# Altium PCB AT_START_F426 V1.0.pcbdoc (part 3 of 3)
Units mil, origin at the board's own origin, x right, y up, seen from the top; angles counter-clockwise.
Board outline 4602.43 x 3597.64 mil, 2 copper layers (Top Layer, Bottom Layer); 123 components, 105 nets, 472 pads, 880 vias.
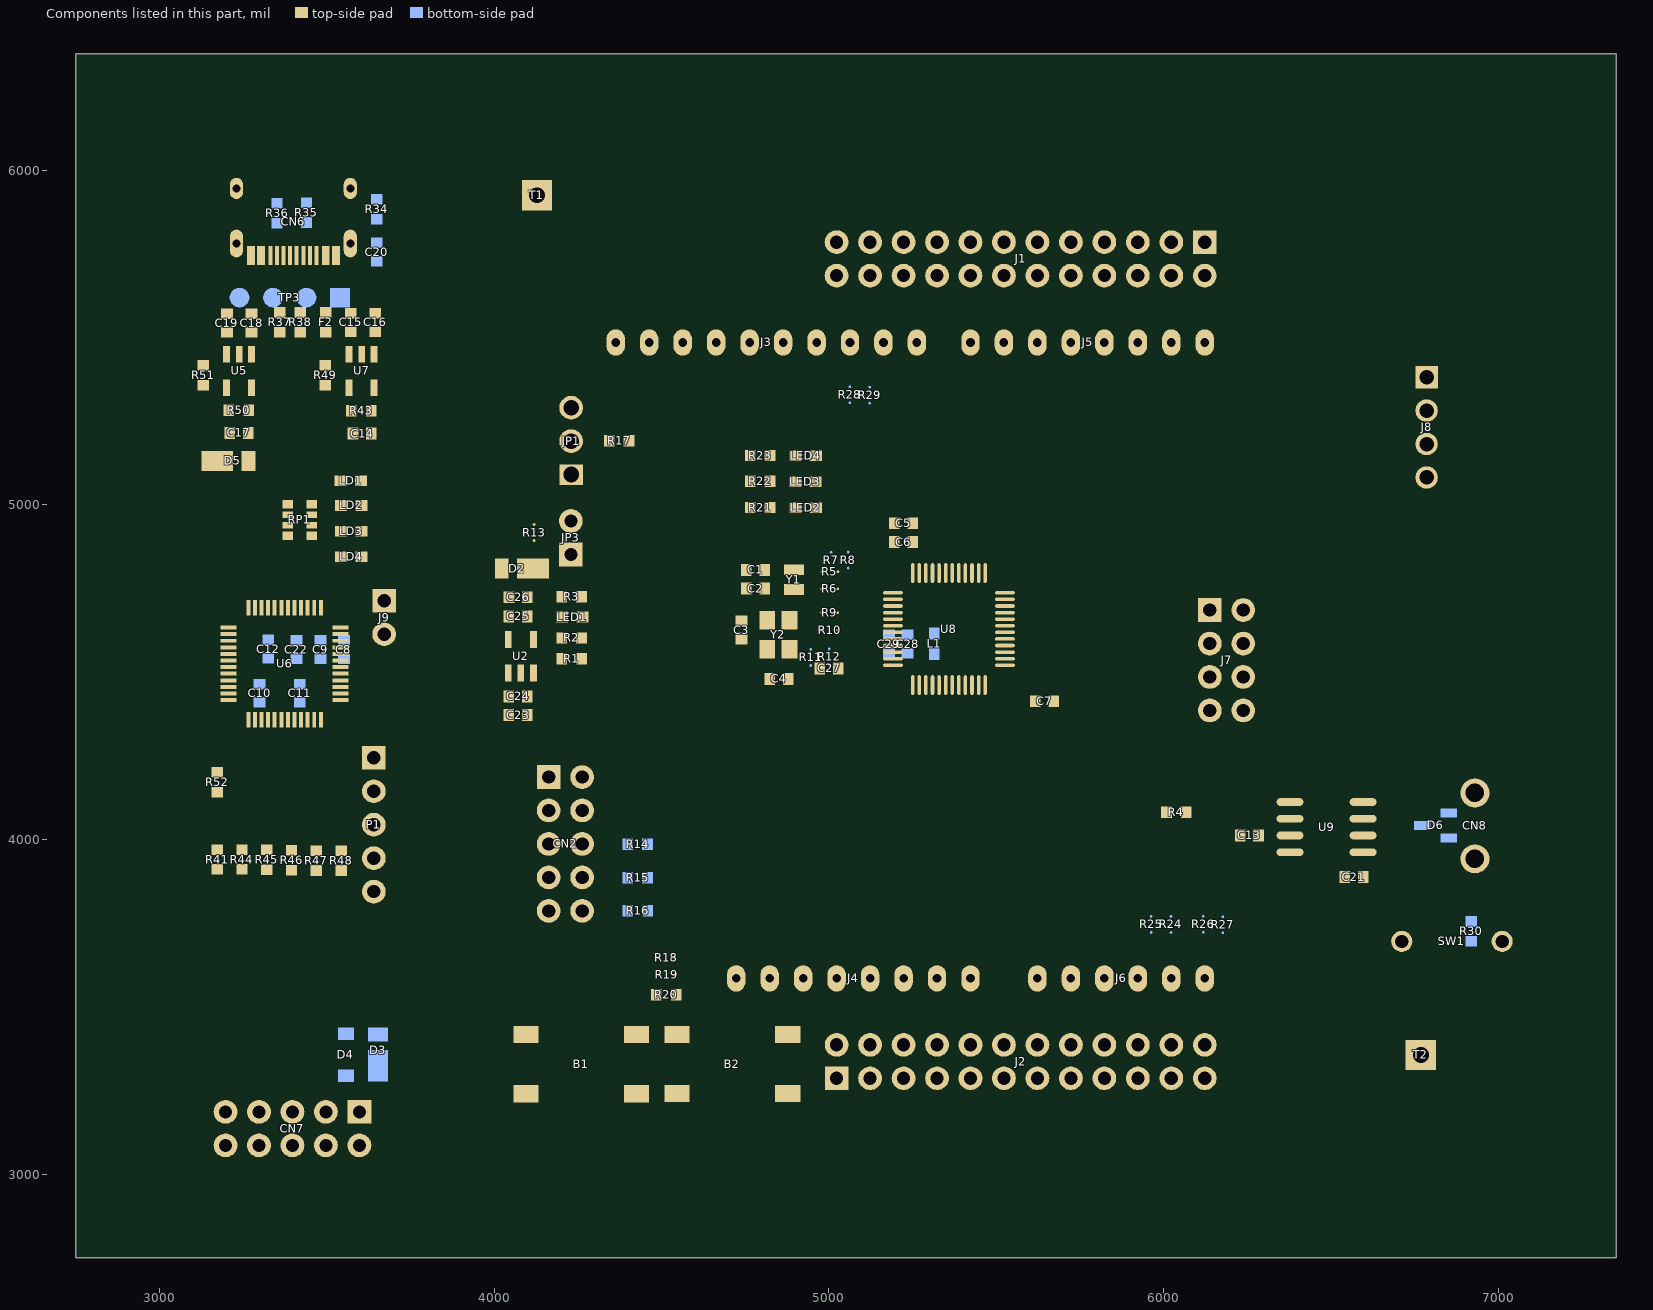
[diagram p3: the components of this part, seen from the top]

## Silkscreen, mask and mechanical layers (free items; w line width, h text height)
Top Silkscreen Layer:
  region: 6025.22,5363.76 6005.22,5343.76 6045.22,5343.76
  region: 6105.22,5363.76 6145.22,5363.76 6125.22,5343.76
  lines w6: 3247.17,3310.09 3247.17,3609.09 ; 3347.23,3310.38 3347.23,3609.09 ; 3447.23,3310.06 3447.23,3609.09 ; 3547.23,3310.06 3547.23,3609.09 ; 4092.37,4187.05 4058.2,4221.22 4058.2,4152.63 4092.5,4186.93 ; 4112.92,3938.94 4076.7,3938.94 4076.7,4033.54 4112.92,4033.54
  lines w8: 3348.17,3235.38 3348.17,3275 3449.17,3275 3449.17,3234.38 ; 3637.17,3303.09 3561.17,3303.09 3600.17,3264.09 3638.17,3302.09
  lines w10: 4735.22,5203.76 6165.22,5203.76 ; 5002.76,3878.27 5455.76,3878.27 ; 5594.19,3878.41 6154.19,3878.41 ; 6558.34,5128.71 6715.82,5128.71 ; 6558.34,5230.37 6715.82,5230.37 ; 6558.34,5328.52 6715.82,5328.52
  text "25" at 6089.12,5955.79 h55.07
  text "47" at 4985.28,5955.39 h55.47
  text "41" at 5295.68,5955.39 h55.47
  text "31" at 5791.84,5955.39 h55.47
  text "B8" at 5113.48,5837.96 h61.63 r45
  text "B7" at 5216,5837.96 h61.63 r45
  text "B5" at 5313.05,5837.96 h61.63 r45
  text "B3" at 5410.41,5837.96 h61.63 r45
  text "A14" at 5504.53,5837.96 h61.63 r45
  text "F6" at 5615.26,5837.96 h61.63 r45
  text "A12" at 5700.85,5837.96 h61.63 r45
  text "A10" at 5803.24,5837.96 h61.63 r45
  text "A8" at 5907.01,5837.96 h61.63 r45
  text "B14" at 6004.61,5837.96 h61.63 r45
  text "B12" at 6104.61,5837.96 h61.63 r45
  text "GND" at 5000.88,5831.81 h61.63 r45
  text "GND" at 4060.22,5753.76 h73.96
  text "BOOT0 /  /F11" at 5163.69,5540.01 h43
  text "B9" at 5122.31,5527.68 h61.63 r45
  text "B6" at 5328.88,5527.68 h61.63 r45
  text "B4" at 5430.31,5527.68 h61.63 r45
  text "A15" at 5521.44,5528.17 h58.55 r45
  text "F7" at 5631.4,5527.68 h61.63 r45
  text "A13" at 5722.77,5528.17 h58.55 r45
  text "A11" at 5826.16,5527.68 h61.63 r45
  text "A9" at 5930.55,5527.68 h61.63 r45
  text "B15" at 6025.8,5528.17 h58.55 r45
  text "B13" at 6123.65,5528.17 h58.55 r45
  text "VDD" at 5014.56,5518.7 h59 r45
  text "USART1" at 6656.32,5453.51 h72
  text "4" at 5764.6,5375.24 h73.42 r90
  text "8" at 5303.6,5374.24 h73.42 r90
  text "7" at 5467.6,5374.24 h73.42 r90
  text "2" at 5961.6,5374.24 h73.42 r90
  text "3V3" at 6571.48,5342.98 h72
  text "13" at 4801.89,5335.23 h73.96 r90
  text "12" at 4901.89,5335.23 h73.96 r90
  text "#6" at 5563.89,5329.23 h73.96 r90
  text "#5" at 5664.89,5329.23 h73.96 r90
  text "#9" at 5202.89,5328.23 h73.96 r90
  text "#3" at 5863.89,5328.23 h73.96 r90
  text "#11" at 5001.89,5290.34 h73.96 r90
  text "#10" at 5102.89,5290.34 h73.96 r90
  text "SCL" at 4401.89,5280.34 h73.96 r90
  text "SDA" at 4501.89,5280.34 h73.96 r90
  text "GND" at 4702.59,5280.34 h73.96 r90
  text "GND" at 3990.22,5253.76 h74
  text "TX" at 6596.28,5241.83 h72
  text "TX 1" at 6064.89,5237.45 h73.96 r90
  text "RX 0" at 6165.89,5237.45 h73.96 r90
  text "VDDA" at 4602.59,5235.45 h73.96 r90
  text "DIGITAL(#=PWM)" at 5162.76,5215.82 h73.96
  text "LD:" at 3666.18,5187.13 h55.47 r270
  text "BOOT0" at 3930.22,5148.76 h73.96
  text "RX" at 6596.28,5141.03 h72
  text "1" at 3668.58,5073.91 h55.07 r270
  text "AT-Link-EZ V1.4" at 3058.4,5051.56 h90 r270
  text "VDD" at 3990.22,5048.76 h74
  text "GND" at 6572.48,5040.92 h72
  text "2" at 3667.58,5006.91 h55.07 r270
  text "3" at 3666.58,4933.91 h55.07 r270
  text "IDD" at 4309.22,4869.76 h73.96
  text "4" at 3667.58,4858.91 h55.07 r270
  text "5V" at 6314.87,4646.94 h73.96
  text "MISO" at 5896.09,4643.76 h73.96
  text "MOSI" at 6319.63,4546.72 h73.96
  text "SCK" at 5898.54,4545.18 h73.96
  text "RESET" at 5847.39,4446.59 h73.96
  text "GND" at 6316.98,4446.51 h73.96
  text "NSS" at 5900.47,4348.01 h73.96
  text "PB11" at 6319.09,4346.84 h73.96
  text "CAN1" at 6839.26,4280.78 h73.96
  text "AT-Link" at 4090.22,4248.76 h74
  text "3V3" at 3890.11,4143.54 h72
  text "E5V" at 4334.11,4141.54 h72
  text "H" at 6758.98,4127.92 h73.96 r90
  text "BOOT0" at 4334.11,4047.54 h72
  text "SWDIO" at 3843.31,4043.54 h72
  text "AT-START-F426 V1.0" at 4676.05,3951.1 h110
  text "SWCLK" at 3820.51,3949.54 h72
  text "SWO" at 4334.11,3943.54 h72
  text "L" at 6758.98,3914.12 h73.96 r90
  text "NRST" at 3880.11,3849.54 h72
  text "USART1_RX" at 4334.11,3843.54 h72
  text "POWER" at 5234.35,3797.44 h73.96
  text "ANALOG IN" at 5758.94,3796.99 h73.96
  text "GND" at 3928.11,3745.54 h72
  text "USART1_TX" at 4334.11,3743.54 h72
  text "IOREF" at 4864.59,3668.41 h73.96 r90
  text "RESET" at 4964.59,3668.41 h73.96 r90
  text "3.3V" at 5062.59,3666.45 h73.96 r90
  text "VIN" at 5466.59,3664.19 h73.96 r90
  text "5V" at 5162.59,3662.23 h73.96 r90
  text "AN0" at 5659.59,3659.19 h73.96 r90
  text "AN1" at 5759.59,3659.19 h73.96 r90
  text "AN2" at 5860.59,3659.34 h73.96 r90
  text "AN3" at 5959.59,3659.19 h73.96 r90
  text "AN4" at 6059.59,3659.19 h73.96 r90
  text "AN5" at 6159.59,3659.19 h73.96 r90
  text "GND" at 5269.59,3657.19 h73.96 r90
  text "GND" at 5371.59,3657.19 h73.96 r90
  text "SWC" at 3357.12,3601.52 h64.72 r270
  text "GND" at 3165.81,3600.51 h64.72 r270
  text "SWD" at 3455.74,3600.37 h64.72 r270
  text "3V3" at 3562.37,3599.36 h64.72 r270
  text "NRST" at 3263.81,3595.66 h64.72 r270
  text "120Ω" at 6793.52,3527.9 h73.96
  text "BOOT0" at 3457.64,3439.04 h58 r270
  text "F1*" at 5210.88,3438.28 h54 r45
  text "NC" at 5325.22,3437.08 h61.63 r45
  text "A0" at 5414.64,3437.08 h61.63 r45
  text "A2" at 5508.14,3437.08 h61.63 r45
  text "A4" at 5607.77,3437.08 h61.63 r45
  text "A6" at 5708.37,3437.08 h61.63 r45
  text "B0" at 5816.32,3437.08 h61.63 r45
  text "B2" at 5913.36,3437.08 h61.63 r45
  text "B11" at 6009.05,3437.08 h61.63 r45
  text "C15*" at 5098.31,3432.97 h54 r45
  text "C13" at 5002.02,3431.77 h58.55 r45
  text "E5V" at 3560.31,3429.96 h64.72 r270
  text "SWO" at 3362.85,3426.08 h64.72 r270
  text "VDD" at 6100.9,3423.71 h61.63 r45
  text "RX" at 3164.92,3414.94 h64.72 r270
  text "TX" at 3263.81,3414.98 h64.72 r270
  text "GND" at 6856.58,3314.51 h73.96
  text "NC" at 5435.22,3133.76 h61.63 r45
  text "F0*" at 5206.69,3132.13 h54 r45
  text "B10" at 6027.02,3131.92 h55.47 r45
  text "F8" at 5031.78,3130.93 h61.63 r45
  text "A1" at 5527.91,3130.93 h61.63 r45
  text "A3" at 5628.09,3130.93 h61.63 r45
  text "A5" at 5732.65,3130.93 h61.63 r45
  text "A7" at 5831.27,3130.93 h61.63 r45
  text "B1" at 5931.33,3130.93 h61.63 r45
  text "C14*" at 5112.78,3126.83 h54 r45
  text "GND" at 6114.58,3125.56 h59 r45
  text "NRST /  /F2" at 5270.76,3117.01 h50
  text "RESET" at 4149.79,3101.72 h73.96
  text "USER" at 4621.95,3102.45 h73.96
  text "7" at 5299.89,3050.58 h55.47
  text "1" at 5017.62,3049.93 h55.47
  text "17" at 5799.09,3049.57 h55.47
  text "23" at 6096.62,3049.93 h55.47
Bottom Silkscreen Layer:
  text "31" at 5825.69,5831.39 h60 r315
  text "29" at 5933.36,5830.76 h60 r315
  text "39" at 5428.69,5828.95 h60 r315
  text "25" at 6131.91,5828.99 h60 r315
  text "41" at 5325.79,5828.42 h60 r315
  text "27" at 6031.38,5827.82 h60 r315
  text "35" at 5633.62,5827.19 h60 r315
  text "33" at 5734.35,5826.62 h60 r315
  text "37" at 5530.9,5826.02 h60 r315
  text "45" at 5131,5824.22 h60 r315
  text "43" at 5234.08,5823.65 h60 r315
  text "47" at 5033.91,5823.05 h60 r315
  text "42" at 5323.91,5553.64 h60 r315
  text "48" at 5020.91,5552.64 h60 r315
  text "46" at 5121.91,5552.64 h60 r315
  text "44" at 5220.91,5552.64 h60 r315
  text "40" at 5422.91,5552.64 h60 r315
  text "38" at 5518.91,5552.64 h60 r315
  text "36" at 5618.91,5552.64 h60 r315
  text "34" at 5719.91,5552.64 h60 r315
  text "32" at 5821.91,5552.64 h60 r315
  text "30" at 5920.91,5552.64 h60 r315
  text "28" at 6021.91,5552.64 h60 r315
  text "26" at 6124.91,5552.64 h60 r315
  text "VDD" at 3701.65,4870.83 h55.47 r90
  text "VDD" at 3574.25,4211.61 h55.47
  text "AT32F426CBT7" at 5708.22,4174.21 h184.9
  text "M-SWDIO" at 3569.47,4113.7 h55.47
  text "M-SWCLK" at 3569.47,4013.7 h55.47
  text "M-NRST" at 3571.05,3913.7 h55.47
  text "GND" at 3575.8,3813.7 h55.47
  text "2" at 5014.61,3438.23 h60 r315
  text "6" at 5214.61,3435.83 h60 r315
  text "8" at 5314.82,3435.83 h60 r315
  text "4" at 5118.61,3434.09 h60 r315
  text "10" at 5420.82,3427.31 h60 r315
  text "12" at 5523.82,3427.31 h60 r315
  text "14" at 5624.82,3427.34 h60 r315
  text "16" at 5726.82,3427.31 h60 r315
  text "18" at 5823.82,3426.71 h60 r315
  text "24" at 6130.82,3426.94 h60 r315
  text "20" at 5926.82,3424.9 h60 r315
  text "22" at 6028.82,3424.9 h60 r315
  text "1" at 5002.98,3176.95 h60 r315
  text "9" at 5409.16,3175.81 h60 r315
  text "3" at 5109.48,3173.66 h60 r315
  text "5" at 5213.1,3174.19 h60 r315
  text "7" at 5307.73,3172.53 h60 r315
  text "11" at 5511.82,3169.45 h60 r315
  text "19" at 5914.82,3167.29 h60 r315
  text "15" at 5717.82,3165.63 h60 r315
  text "13" at 5612.82,3165.1 h60 r315
  text "17" at 5815.82,3164.54 h60 r315
  text "21" at 6017.82,3163.26 h60 r315
  text "23" at 6117.82,3156.91 h60 r315
Mechanical Layer:
  circle w1: c6613.59,5921.94 r62.99
  circle w1: c6613.59,3147.26 r62.99
  circle w1: c3926.17,3147.26 r62.99
  circle w1: c4172.52,3585.63 r62.99
  circle w1: c6222.52,4885.63 r62.99
  circle w1: c4222.52,5485.63 r62.99
  circle w1: c3926.19,5921.94 r62.99

## Text inside footprints (layer, text, board x,y; h text height)
SW1: Mech6 "1" at 6965.66,3688.84 h20 r90